# Altium PCB MiniRoverShield(1).PcbDoc
Units mm, origin at the board's own origin, x right, y up, seen from the top; angles counter-clockwise.
Board outline 75 x 51 mm, 2 copper layers (F.Cu, B.Cu); 33 components, 48 nets, 185 pads, 277 vias.
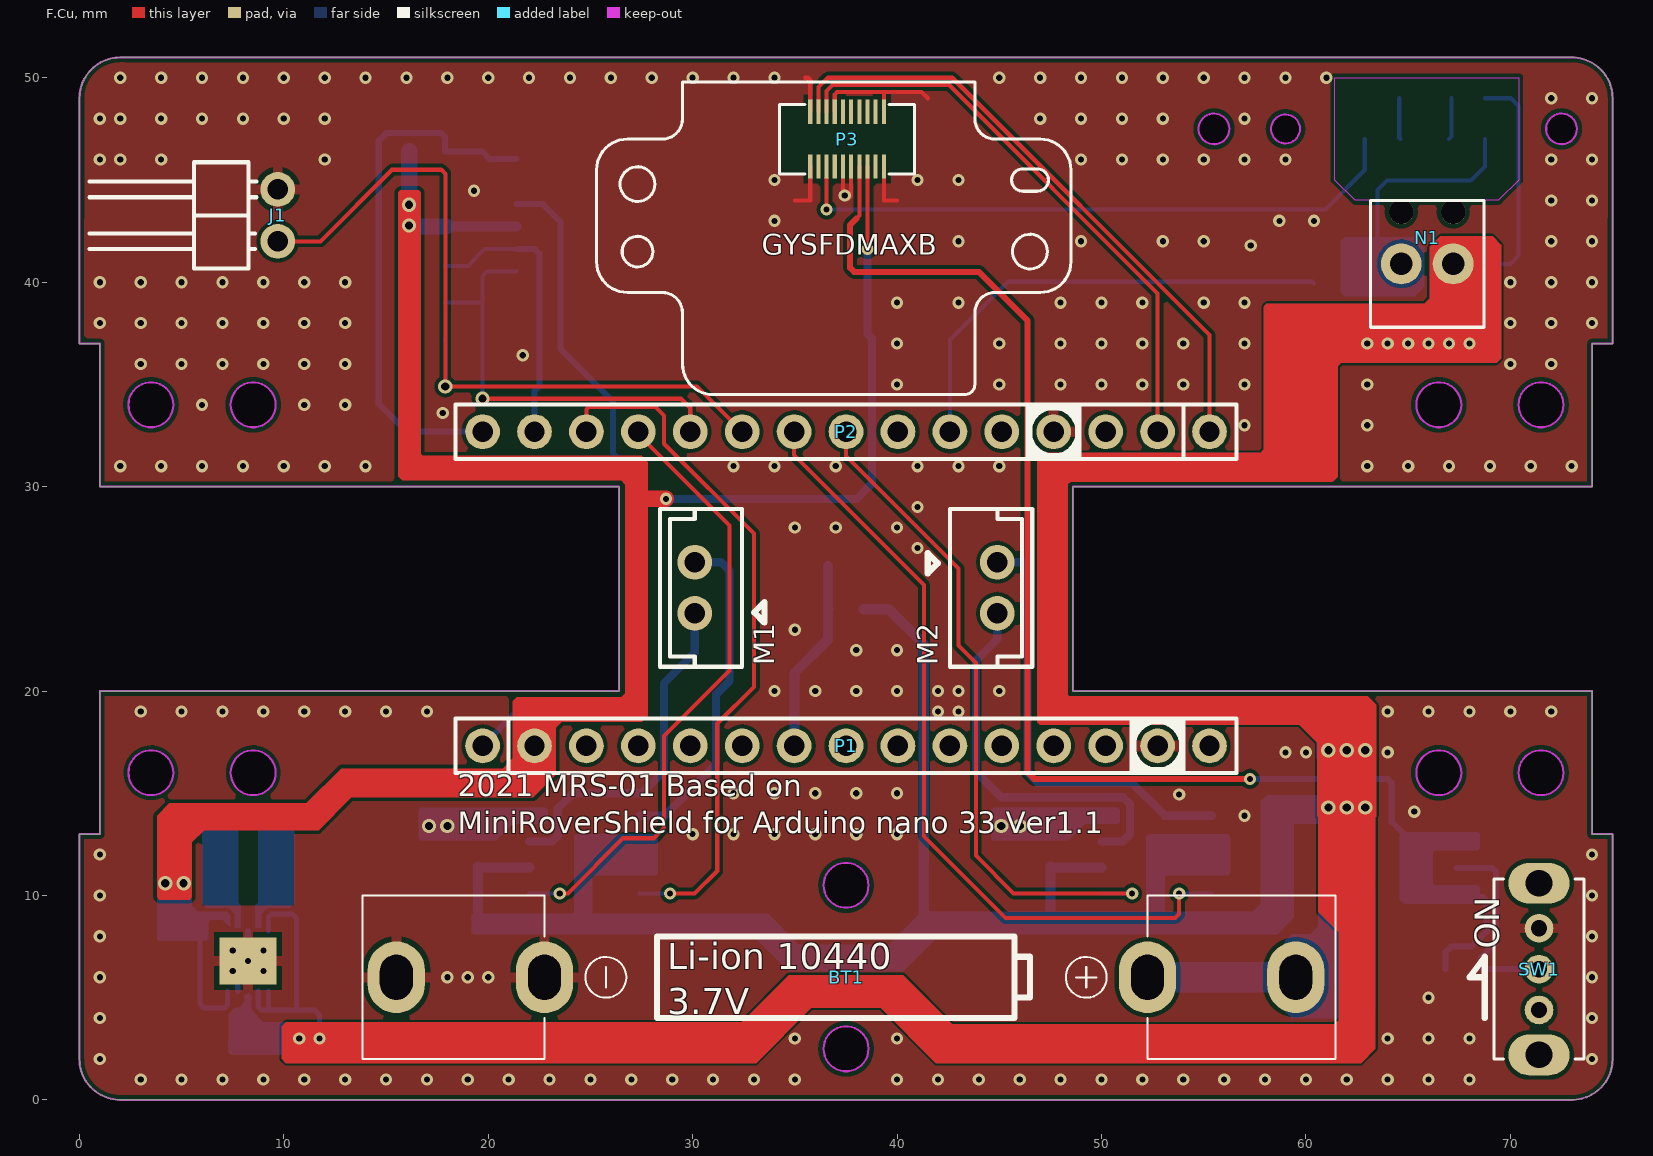
[diagram p0: F.Cu view]
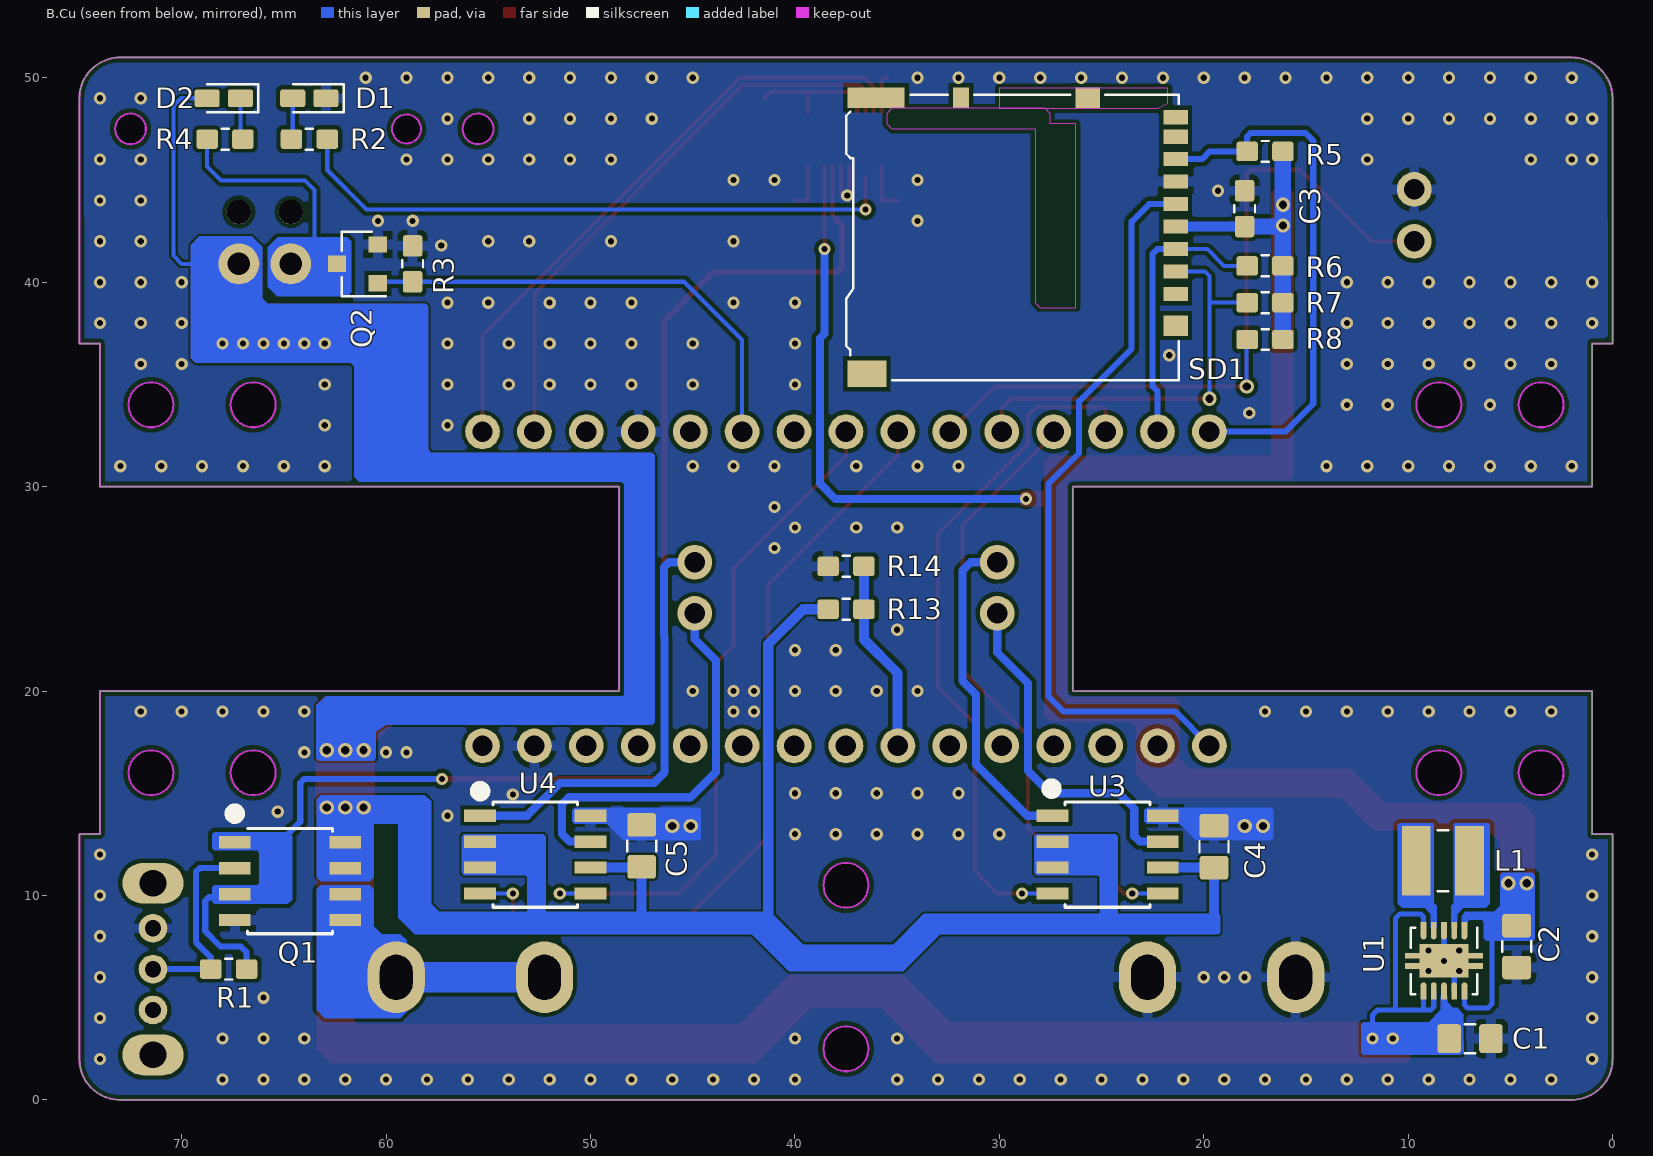
[diagram p1: B.Cu view, seen from below]

## Layer stack, top to bottom
F.Mask: solder mask 0.0102, Solder Resist, Dk 3.5
F.Cu: signal copper 0.0356
Dielectric 1: dielectric 0.32, FR-4, Dk 4.8
B.Cu: signal copper 0.0356
B.Mask: solder mask 0.0102, Solder Resist, Dk 3.5

## Board outline
0,2 0,13 1,13 1,20 26.4,20 26.4,30 1,30 1,37 0,37 0.003,49 cw(c2,49) 2.004,50.997 72.954,50.997 cw(c73,48.993) 75.004,48.991 75,37 74,37 74,30 48.6,30 48.6,20 74,20 74,13 75,13 75.003,2 cw(c73,2) 73.004,-0.003 36.004,-0.003 2,0 cw(c2,2)
cut-out: 54.754,47.497 ccw(c55.504,47.497) 55.504,46.747 ccw(c55.504,47.497) 56.254,47.497 ccw(c55.504,47.497) 55.504,48.247 ccw(c55.504,47.497)
cut-out: 58.296,47.497 ccw(c59.004,47.497) 59.004,46.79 ccw(c59.004,47.497) 59.711,47.497 ccw(c59.004,47.497) 59.004,48.204 ccw(c59.004,47.497)
cut-out: 71.754,47.497 ccw(c72.504,47.497) 72.504,46.747 ccw(c72.504,47.497) 73.254,47.497 ccw(c72.504,47.497) 72.504,48.247 ccw(c72.504,47.497)
cut-out: 65.4,34 ccw(c66.5,34) 66.5,32.9 ccw(c66.5,34) 67.6,34 ccw(c66.5,34) 66.5,35.1 ccw(c66.5,34)
cut-out: 70.4,34 ccw(c71.5,34) 71.5,32.9 ccw(c71.5,34) 72.6,34 ccw(c71.5,34) 71.5,35.1 ccw(c71.5,34)
cut-out: 70.4,16 ccw(c71.5,16) 71.5,14.9 ccw(c71.5,16) 72.6,16 ccw(c71.5,16) 71.5,17.1 ccw(c71.5,16)
cut-out: 65.4,16 ccw(c66.5,16) 66.5,14.9 ccw(c66.5,16) 67.6,16 ccw(c66.5,16) 66.5,17.1 ccw(c66.5,16)
cut-out: 36.404,2.497 ccw(c37.504,2.497) 37.504,1.397 ccw(c37.504,2.497) 38.604,2.497 ccw(c37.504,2.497) 37.504,3.597 ccw(c37.504,2.497)
cut-out: 36.404,10.497 ccw(c37.504,10.497) 37.504,9.397 ccw(c37.504,10.497) 38.604,10.497 ccw(c37.504,10.497) 37.504,11.597 ccw(c37.504,10.497)
cut-out: 7.4,16 ccw(c8.5,16) 8.5,14.9 ccw(c8.5,16) 9.6,16 ccw(c8.5,16) 8.5,17.1 ccw(c8.5,16)
cut-out: 8.5,32.9 cw(c8.5,34) 7.4,34 cw(c8.5,34) 8.5,35.1 cw(c8.5,34) 9.6,34 cw(c8.5,34)
cut-out: 3.5,32.9 cw(c3.5,34) 2.4,34 cw(c3.5,34) 3.5,35.1 cw(c3.5,34) 4.6,34 cw(c3.5,34)
cut-out: 2.4,16 ccw(c3.5,16) 3.5,14.9 ccw(c3.5,16) 4.6,16 ccw(c3.5,16) 3.5,17.1 ccw(c3.5,16)

## Design rules (kind name [scope] priority, off if disabled: settings)
Clearance "Clearence 0.3_NetClass" [InNetClass('Vbat')] p1: gap=0.127 ignorepadtopadclearanceinfootprint=FALSE
Clearance "Clearence 0.3_Polygon" [InNamedPolygon('B.Cu-GND') OR InNamedPolygon('F.Cu-GND')] p2: gap=0.2 ignorepadtopadclearanceinfootprint=FALSE
Clearance "Clearence 0.2_NetClass" [InNetClass('3.3V')] p3: gap=0.2 ignorepadtopadclearanceinfootprint=FALSE
Clearance "Clearence 0.1524_NetClass" [InNetClass('Default')] p4: gap=0.152 ignorepadtopadclearanceinfootprint=FALSE
HoleSize "Hole Size (Default)" [All] p1: absolutevalues=TRUE maxlimit=10 minlimit=0.3 maxpercent=80.000 minpercent=20.000
MinimumSolderMaskSliver [All] p1: minsoldermaskwidth=0
PolygonConnect Polygon_F.Cu-GND_ConnectDirect [IsNamedPolygon('F.Cu-GND') vs IsVia] p1: connectstyle=Direct reliefconductorwidth=0.254 reliefentries=4 polygonreliefangle="90 Angle" airgapwidth=0.254
PolygonConnect Polygon_F.Cu-GND_ConnectRelief45 [IsNamedPolygon('F.Cu-GND') vs (IsThruPin or IsSMTPin) and (PadShape_AllLayers = 'Round')] p2: connectstyle=Relief reliefconductorwidth=0.508 reliefentries=4 polygonreliefangle="45 Angle" airgapwidth=0.254
PolygonConnect Polygon_F.Cu-GND_ConnectRelief90 [IsNamedPolygon('F.Cu-GND') vs (IsThruPin or IsSMTPin) and (PadShape_AllLayers <> 'Round')] p3: connectstyle=Relief reliefconductorwidth=0.508 reliefentries=4 polygonreliefangle="90 Angle" airgapwidth=0.254
PolygonConnect Polygon_B.Cu-GND_ConnectDirect [IsNamedPolygon('B.Cu-GND') vs IsVia] p4: connectstyle=Direct reliefconductorwidth=0.254 reliefentries=4 polygonreliefangle="90 Angle" airgapwidth=0.254
PolygonConnect Polygon_B.Cu-GND_ConnectRelief45 [IsNamedPolygon('B.Cu-GND') vs (IsThruPin or IsSMTPin) and (PadShape_AllLayers = 'Round')] p5: connectstyle=Relief reliefconductorwidth=0.508 reliefentries=4 polygonreliefangle="45 Angle" airgapwidth=0.254
PolygonConnect Polygon_B.Cu-GND_ConnectRelief90 [IsNamedPolygon('B.Cu-GND') vs (IsThruPin or IsSMTPin) and (PadShape_AllLayers <> 'Round')] p6: connectstyle=Relief reliefconductorwidth=0.508 reliefentries=4 polygonreliefangle="90 Angle" airgapwidth=0.254
RoutingVias [All] p1: holewidth=0.3 width=0.6 viastyle="Through Hole" minholewidth=0.3 minwidth=0.5 maxholewidth=0.5 maxwidth=1
SilkToSilkClearance [All] p1: silktosilkclearance=0
SilkToSolderMaskClearance [IsPad] p1: minsilkscreentomaskgap=0 clearancetoexposedcopper=TRUE
SolderMaskExpansion [All] p1: expansion=0.102 istentingtop=FALSE
Width [All] p1: maxlimit=10 minlimit=0.152 preferedwidth=0.2 minimp=50.000000 maximp=50.000000 favimp=50.000000
26 further rules are at their usual default settings.

## Classes and differential pairs
net class Vbat: +VSW
net class 3.3V: +3V3
net class Default: +BATT Arduino←GPS Arduino→GPS CS flightPin GND MISO MOSI MotorL1 MotorL2 MotorR1 MotorR2 Net-(BT1-Pad1) Net-(D1-Pad2) Net-(D2-Pad1) Net-(L1-Pad1) Net-(L1-Pad2) Net-(M1-Pad1) Net-(M1-Pad2) Net-(M2-Pad1) Net-(M2-Pad2) Net-(N1-Pad2) Net-(P1-Pad3) Net-(P1-Pad4) Net-(P1-Pad5) Net-(P1-Pad6) Net-(P1-Pad8) Net-(P1-Pad9) Net-(P1-Pad10) Net-(P1-Pad11) Net-(P1-Pad12) Net-(P1-Pad13) Net-(P1-Pad15) Net-(P2-Pad3) Net-(P2-Pad5) Net-(P2-Pad7) Net-(P3-Pad4) Net-(P3-Pad6) Net-(Q1-Pad2) Net-(SD1-Pad1) Net-(SD1-Pad8) Net-(SD1-Pad9) Nichrome SCK Vbatt

## Components (designator, comment, footprint, x,y, rotation, side; value= is the part's Value field where it differs from the comment)
BT1 "Comment" BC-0402_AAA 52.254,5.997 r180 top locked
C1 "Comment" C_0805_2012Metric_Pad1.15x1.40mm_HandSolder 6.975,3 r0 bottom
C2 "Comment" C_0805_2012Metric_Pad1.15x1.40mm_HandSolder 4.7,7.5 r90 bottom
C3 "Comment" C_0603_1608Metric_Pad1.05x0.95mm_HandSolder 18.004,43.597 r270 bottom
C4 "Comment" C_0805_2012Metric_Pad1.15x1.40mm_HandSolder 19.5,12.383 r270 bottom
C5 "Comment" C_0805_2012Metric_Pad1.15x1.40mm_HandSolder 47.5,12.425 r270 bottom
D1 "Comment" LED_0603_1608Metric_Castellated 63.754,48.997 r180 bottom
D2 "Comment" LED_0603_1608Metric_Castellated 67.941,48.997 r180 bottom
J1 "Comment" PinHeader_1x02_P2.54mm_Horizontal 9.704,41.997 r180 top
L1 "Comment" TDK_VLS3012 8.3,11.7 r0 bottom
M1 "Comment" JST_EH_B02B-EH-A_1x02_P2.50mm_Vertical 30.104,23.797 r90 top
M2 "Comment" JST_EH_B02B-EH-A_1x02_P2.50mm_Vertical 44.904,26.297 r270 top
N1 "Comment" MPT0.5_2-2.54 68.704,43.997 r180 top
P1 "Comment" PinSocket_1x15_P2.54mm_Vertical 19.724,17.317 r90 top
P2 "Comment" PinSocket_1x15_P2.54mm_Vertical 55.284,32.687 r270 top
P3 "GYSFDMAXB" GYSFDMAXB 37.554,46.997 r180 top locked
Q1 "Comment" SOIC-8_3.9x4.9mm_P1.27mm 64.7,10.7 r0 bottom
Q2 "Comment" SOT-23 61.404,40.897 r180 bottom
R1 "Comment" R_0603_1608Metric_Pad1.05x0.95mm_HandSolder 67.701,6.399 r180 bottom
R2 "Comment" R_0603_1608Metric_Pad1.05x0.95mm_HandSolder 63.754,46.997 r180 bottom
R3 "Comment" R_0603_1608Metric_Pad1.05x0.95mm_HandSolder 58.704,40.897 r270 bottom
R4 "Comment" R_0603_1608Metric_Pad1.05x0.95mm_HandSolder 67.879,46.997 r180 bottom
R5 "Comment" R_0603_1608Metric_Pad1.05x0.95mm_HandSolder 17.004,46.397 r180 bottom
R6 "Comment" R_0603_1608Metric_Pad1.05x0.95mm_HandSolder 17.004,40.797 r180 bottom
R7 "Comment" R_0603_1608Metric_Pad1.05x0.95mm_HandSolder 17.004,38.997 r180 bottom
R8 "Comment" R_0603_1608Metric_Pad1.05x0.95mm_HandSolder 17.004,37.197 r180 bottom
R13 "Comment" R_0603_1608Metric_Pad1.05x0.95mm_HandSolder 37.5,24 r0 bottom
R14 "Comment" R_0603_1608Metric_Pad1.05x0.95mm_HandSolder 37.5,26.1 r180 bottom
SD1 "Comment" microSD_HC_Hirose_DM3AT-SF-PEJM5 29.104,42.197 r90 bottom locked
SW1 "Power" SS-12D01-VG4 71.404,6.397 r270 top
U1 "Comment" Texas_S-PVSON-N10_ThermalVias 8.25,6.8 r90 bottom
U3 "Comment" SOIC-8_3.9x4.9mm_P1.27mm 24.704,11.997 r0 bottom
U4 "Comment" SOIC-8_3.9x4.9mm_P1.27mm 52.704,11.997 r0 bottom

## Footprints (in the part's own frame and the unit in brackets; to place one, negate y for a bottom-side part, rotate by r counter-clockwise, add the part's x,y. Pads: shape width x height; smd on the part's side, far side on the other; paste and mask are expansions set on the pad)
BC-0402_AAA [mm]
  rrect100% 2.8x3.5 hole 2.2 slot 1.6 at 0 deg paste-3.5 mask-0.4: 1(-7.25,0) 1(0,0) 2(29.5,0) 2(36.75,0)
  silkscreen extent -9.2,-4 38.4,4
C_0603_1608Metric_Pad1.05x0.95mm_HandSolder [mm]
  rrect25% 1.05x0.95 smd paste-1.05 mask+0: 1(0.875,0) 2(-0.875,0)
  silkscreen extent -0.17,-0.51 0.17,0.51
C_0805_2012Metric_Pad1.15x1.40mm_HandSolder [mm]
  rrect22% 1.15x1.4 smd paste-1.4 mask+0: 1(1.025,0) 2(-1.025,0)
  silkscreen extent -0.26,-0.71 0.26,0.71
GYSFDMAXB [mm]
  rect 0.2x1.19 smd paste-2.5 mask+0: 1(1.8,-1.34) 2(1.8,1.34) 3(1.4,-1.34) 4(1.4,1.34) 5(1,-1.34) 6(1,1.34) 7(0.6,-1.34) 8(0.6,1.34) 9(0.2,-1.34) 10(0.2,1.34) 11(-0.2,-1.34) 12(-0.2,1.34) 13(-0.6,-1.34) 14(-0.6,1.34) 15(-1,-1.34) 16(-1,1.34) 17(-1.4,-1.34) 18(-1.4,1.34) 19(-1.8,-1.34) 20(-1.8,1.34)
  silkscreen extent -10.95,-2.8 12.25,12.5
JST_EH_B02B-EH-A_1x02_P2.50mm_Vertical [mm]
  round 1.7 hole 1 paste-2 mask-0.2: 1(0,0)
  rrect100% 1.7x1.7 hole 1 paste-2 mask-0.2: 2(2.5,0)
  silkscreen extent -2.61,-2.31 5.11,1.71
LED_0603_1608Metric_Castellated [mm]
  rrect25% 1.225x0.85 smd paste-1.225 mask+0: 1(0.813,0) 2(-0.813,0)
  silkscreen extent -0.8,-0.68 1.69,0.68
microSD_HC_Hirose_DM3AT-SF-PEJM5 [mm]
  rect 0.7x1.2 smd paste-1.2 mask+0: 1(-2.775,-7.725) 2(-1.675,-7.725) 3(-0.575,-7.725) 4(0.525,-7.725) 5(1.625,-7.725) 6(2.725,-7.725) 7(3.825,-7.725) 8(4.925,-7.725) 9(5.875,-7.725)
  rect 1x0.8 smd paste-1 mask+0: 10(6.825,2.775)
  rect 1.3x1.9 smd paste-1.9 mask+0: 11(-6.675,7.375)
  rect 1x1.2 smd paste-1.2 mask+0: 11(-4.325,-7.725) 11(6.825,-3.425)
  rect 1x2.8 smd paste-2.8 mask+0: 11(6.825,6.925)
  silkscreen extent -6.99,-7.89 6.98,8.38
MPT0.5_2-2.54 [mm]
  round 2 hole 1.1 paste-2 mask+0: 1(1.5,3.1) 2(4.04,3.1)
  round 1.2 hole 1.2 paste-1.2 mask+0: Un1(1.5,0.56) Un2(4.04,0.56)
  silkscreen extent 0,0 5.54,6.2
PinHeader_1x02_P2.54mm_Horizontal [mm]
  round 1.7 hole 1 paste-1.7 mask+0: 1(0,0)
  rrect100% 1.7x1.7 hole 1 paste-1.7 mask+0: 2(0,-2.54)
  silkscreen extent 1.04,-3.87 9.2,1.33
PinSocket_1x15_P2.54mm_Vertical [mm]
  round 1.7 hole 1 paste-1.7 mask+0: 1(0,0)
  rrect100% 1.7x1.7 hole 1 paste-1.7 mask+0: 2(0,-2.54) 3(0,-5.08) 4(0,-7.62) 5(0,-10.16) 6(0,-12.7) 7(0,-15.24) 8(0,-17.78) 9(0,-20.32) 10(0,-22.86) 11(0,-25.4) 12(0,-27.94) 13(0,-30.48) 14(0,-33.02) 15(0,-35.56)
  silkscreen extent -1.33,-36.89 1.33,1.33
R_0603_1608Metric_Pad1.05x0.95mm_HandSolder [mm]
  rrect25% 1.05x0.95 smd paste-1.05 mask+0: 1(0.875,0) 2(-0.875,0)
  silkscreen extent -0.17,-0.51 0.17,0.51
SOIC-8_3.9x4.9mm_P1.27mm [mm]
  rect 1.55x0.6 smd paste-1.55 mask+0: 1(2.7,-1.905) 2(2.7,-0.635) 3(2.7,0.635) 4(2.7,1.905) 5(-2.7,1.905) 6(-2.7,0.635) 7(-2.7,-0.635) 8(-2.7,-1.905)
  silkscreen extent -2.08,-2.58 2.07,2.57
SOT-23 [mm]
  rect 0.9x0.8 smd paste-0.9 mask+0: 1(1,-0.95) 2(1,0.95) 3(-1,0)
  silkscreen extent -0.76,-1.58 1.4,1.58
SS-12D01-VG4 [mm]
  rrect100% 1.4x1.4 hole 0.8 paste-2.2 mask+0: 1(-2,0) 2(0,0) 3(2,0)
  rrect100% 2x3 hole 1.3 paste-3 mask+0: Un1(-4.2,0) Un2(4.2,0)
  silkscreen extent -4.4,-2.2 4.4,2.2
TDK_VLS3012 [mm]
  rect 1.4x3.4 smd paste-3.4 mask+0: 1(1.3,0) 2(-1.3,0)
  silkscreen extent -0.25,-1.49 0.25,1.5
Texas_S-PVSON-N10_ThermalVias [mm]
  rrect100% 0.85x0.28 smd paste-0.85 mask+0.07: 1(1.475,-1) 2(1.475,-0.5) 3(1.475,0) 4(1.475,0.5) 5(1.475,1) 6(-1.475,1) 7(-1.475,0.5) 8(-1.475,0) 9(-1.475,-0.5) 10(-1.475,-1)
  rect 0.28x0.28 smd paste-0.28 mask+0.07: 1(1.76,-1) 2(1.76,-0.5) 3(1.76,0) 4(1.76,0.5) 5(1.76,1) 6(-1.76,1) 7(-1.76,0.5) 8(-1.76,0) 9(-1.76,-0.5) 10(-1.76,-1)
  round 0.6 hole 0.3 paste-0.6 mask+0: 11(-0.5,-0.75) 11(-0.5,0.75) 11(0,0) 11(0.5,-0.75) 11(0.5,0.75)
  rect 0.68x1.05 smd paste-1.05 mask+0: 11(-0.45,-0.635) 11(-0.45,0.635) 11(0.45,-0.635) 11(0.45,0.635)
  rect 0.26x0.5 smd paste-0.5 mask+0: 11(-0.25,-1.63) 11(-0.25,1.63) 11(0.25,-1.63) 11(0.25,1.63)
  rect 0.28x0.7 smd paste-0.7 mask+0: 11(-0.25,-1.55) 11(-0.25,1.55) 11(0.25,-1.55) 11(0.25,1.55)
  rect 1.65x2.4 smd paste-2.4 mask+0: 11(0,0)
  rect 2.3x2.8 smd far side paste-2.8 mask-2.8: 11(0,0)
  silkscreen extent -1.63,-1.63 1.63,1.63

## Part data
BT1: library part BC-0402_AAA
C1 C2 C4 C5: library part C_0805_2012Metric_Pad1.15x1.40mm_HandSolder, "Capacitor SMD 0805 (2012 Metric), square (rectangular) end terminal, IPC_7351 nominal with elongated pad for handsoldering. (Body size source: https://docs.google.com/spreadsheets/d/1BsfQQcO9C6DZCsRaXUlFlo91Tg2WpOkGARC1WS5S8t0/edit?usp=sharing), generated with kicad-footprint-generator"
C3: library part C_0603_1608Metric_Pad1.05x0.95mm_HandSolder, "Capacitor SMD 0603 (1608 Metric), square (rectangular) end terminal, IPC_7351 nominal with elongated pad for handsoldering. (Body size source: http://www.tortai-tech.com/upload/download/2011102023233369053.pdf), generated with kicad-footprint-generator"
D1 D2: library part LED_0603_1608Metric_Castellated, "LED SMD 0603 (1608 Metric), castellated end terminal, IPC_7351 nominal, (Body size source: http://www.tortai-tech.com/upload/download/2011102023233369053.pdf), generated with kicad-footprint-generator"
J1: library part PinHeader_1x02_P2.54mm_Horizontal, "Through hole angled pin header, 1x02, 2.54mm pitch, 6mm pin length, single row"
L1: library part TDK_VLS3012
M1 M2: library part JST_EH_B02B-EH-A_1x02_P2.50mm_Vertical, "JST EH series connector, B02B-EH-A (http://www.jst-mfg.com/product/pdf/eng/eEH.pdf), generated with kicad-footprint-generator"
N1: library part MPT0.5_2-2.54
P1 P2: library part PinSocket_1x15_P2.54mm_Vertical, "Through hole straight socket strip, 1x15, 2.54mm pitch, single row (from Kicad 4.0.7), script generated"
Q1 U3 U4: library part SOIC-8_3.9x4.9mm_P1.27mm, "8-Lead Plastic Small Outline (SN) - Narrow, 3.90 mm Body [SOIC] (see Microchip Packaging Specification 00000049BS.pdf)"
Q2: library part SOT-23, "SOT-23, Standard"
R1 R2 R3 R4 R5 R6 R7 R8 R13 R14: library part R_0603_1608Metric_Pad1.05x0.95mm_HandSolder, "Resistor SMD 0603 (1608 Metric), square (rectangular) end terminal, IPC_7351 nominal with elongated pad for handsoldering. (Body size source: http://www.tortai-tech.com/upload/download/2011102023233369053.pdf), generated with kicad-footprint-generator"
SD1: library part microSD_HC_Hirose_DM3AT-SF-PEJM5, "Micro SD, SMD, right-angle, push-pull (https://www.hirose.com/product/en/download_file/key_name/DM3AT-SF-PEJM5/category/Drawing%20(2D)/doc_file_id/44099/?file_category_id=6&item_id=06090031000&is_series=)"
SW1: library part SS-12D01-VG4
U1: library part Texas_S-PVSON-N10_ThermalVias, "3x3mm Body, 0.5mm Pitch, S-PVSON-N10, DRC, http://www.ti.com/lit/ds/symlink/tps61201.pdf"

## Via types
v1: diameter 0.6, hole 0.3, F.Cu to B.Cu, tented both sides, 261 vias
v2: diameter 0.7, hole 0.4, F.Cu to B.Cu, tented both sides, 16 vias

## Nets (pads, with @x,y where several pads share a name; then routed paths per layer and width w, separated by ;. In a path a pad name is that pad's centre, name@x,y a point inside that pad or via, vN(x,y) a via of type N, cw(c..) or ccw(c..) an arc to the next point about the centre after c; other vN are vias at no path point)
+3V3: C2.1 C3.1 P1.2 P3.16 R5.1 R6.1 R7.1 R8.1 SD1.4 U1.1 U1.10 | length 47.5
  F.Cu w0.2: v1@38.548,41.615 v1(38.554,41.621) P3.16
  F.Cu w0.8: 27.3,29.4 v1(28.7,29.4)
  B.Cu w0.25: 5.9,8.2 5.9,4.7 6.1,4.5 7.1,4.5 7.25,4.65 7.25,5.04 U1.10@7.25,5.325
  B.Cu w0.4: v1(28.7,29.4) 38.027,29.4 38.774,30.147 38.774,37.259 38.554,37.479 v1(38.554,41.621)
  B.Cu w0.5: C3.1 SD1.4
  B.Cu w0.8: R8.1 R7.1 R6.1 v2@16.129,42.697 ; R5.1 v2(16.129,43.789) v2(16.129,42.769) v2@16.129,42.697 ; C3.1@17.954,42.722 16.154,42.722 v2@16.129,42.697 ; P1.2 P1.2@22.312,17.366
  other v2: 4.2,10.6 5.1,10.6
+BATT: P3.14 Q1.1 Q1.3 R1.1 | length 66.9
  F.Cu w0.2: 38,43.1 38.154,43.254 P3.14
  F.Cu w0.3: 38,43.1 37.7,42.8 37.7,40.7 37.9,40.5 44,40.5 46.384,38.116 46.384,16.016 46.7,15.7 v1(57.26,15.7)
  B.Cu w0.3: v1(57.26,15.7) 64,15.7 64.2,15.5 64.2,13.6 65.195,12.605 Q1.1 ; R1.1 66.826,7.226 67.1,7.5 68.1,7.5 68.848,8.248 68.848,9.739 68.672,9.915 67.55,9.915 Q1.3
+VSW: C1.1 C4.1 C5.1 D2.2 N1.1 Q1.7 Q1.8 R13.1 U1.5 U1.6 U1.7 U1.8 U3.2 U3.3 U3.6 U4.2 U4.3 U4.6 | length 59.6
  F.Cu w1.5: v1(10.754,3.004) 10.757,3 v1(11.75,3) 17.997,3 18.004,3.007
  B.Cu w0.2: N1.1 69.997,40.897 70.4,41.3 70.4,48.627 70.03,48.997 D2.2
  B.Cu w0.25: U1.7@8.75,5.325 8.75,4.546 8.896,4.4 9.288,4.4 ; U1.6@9.25,5.325 9.25,5.04 9.25,4.438 9.288,4.4 ; U1.5@9.25,8.275 9.25,8.56 9.25,8.95 9.4,9.1 10.4,9.1 10.628,8.872 10.628,4.406 10.622,4.4 ; v1(11.75,3) 11.75,4.15 11.5,4.4 10.622,4.4 ; 9.288,4.4 10.622,4.4
  B.Cu w0.5: 19.5,8.9 C4.1@19.5,11.4 ; C4.1@19.538,11.362 U3.6 ; R13.1 39.6,24 41.3,22.3 41.3,8.8 ; 47.5,8.9 C5.1 47.538,11.362 U4.6
  other v1: 63,37 64,37 65,37 66,37 67,37 68,37
  other v2: 61.1,14.3 62,14.3 62.9,14.3 61.1,17.1 62,17.1 62.9,17.1
Arduino←GPS: P2.2 P3.5 | length 28.3
  F.Cu w0.2: P3.5@36.554,48.317 36.554,49.354 36.848,49.648 42.552,49.648 52.744,39.456 P2.2
Arduino→GPS: P2.1 P3.3 | length 30.5
  F.Cu w0.2: P3.3 36.154,49.542 36.612,50 42.7,50 55.284,37.416 P2.1
CS: P2.11 R7.2 SD1.2 | length 21.1
  F.Cu w0.2: v2(19.724,34.298) 29.423,34.298 29.884,33.837 P2.11
  B.Cu w0.2: R7.2 19.724,38.997 ; v2(19.724,34.298) 19.724,38.997 ; SD1.2 19.939,40.522 19.724,40.307 19.724,38.997
flightPin: J1.1 P2.10 R8.2 | length 37.9
  F.Cu w0.2: J1.1 11.797,41.997 15.3,45.5 17.704,45.5 17.9,45.304 v2(17.9,34.9) 30.211,34.9 P2.10
  B.Cu w0.2: R8.2 17.9,37.176 v2(17.9,34.9)
GND: BT1.2 C1.2 C2.2 C3.2 C4.2 C5.2 D1.1 J1.2 P1.14 P2.4 P3.1 P3.2 P3.7 P3.10 P3.12 P3.19 P3.20 Q1.4 Q2.2 R3.2 R14.2 SD1.6 SW1.1 U1.3 U1.9 U1.11 U3.8 U4.8 | length 20
  F.Cu w0.152: v1@40.941,45 v1(41,45)
  F.Cu w0.2: 35,44 35.754,44 P3.2 ; 35.491,50 35.636,50 35.754,49.883 P3.1 ; P3.7 36.954,49.178 37.071,49.295 39.354,49.295 ; P3.10 37.354,44.108 37.636,44.108 37.754,44.225 P3.12 ; P3.20 39.354,44 40,44 ; P3.19 39.354,49.295 ; 41.5,49 41.205,49.295 39.354,49.295
  B.Cu w0.28: U1.9@7.75,5.325 7.75,6.8 8.25,6.8 U1.3@8.25,8.275
  other v1: 3,1 5,1 7,1 9,1 11,1 13,1 15,1 17,1 19,1 21,1 23,1 25,1 27,1 29,1 31,1 33,1 35,1 40,1 42,1 44,1 46,1 48,1 50,1 52,1 54,1 56,1 58,1 60,1 62,1 64,1 66,1 68,1 1,2 74,2 35,3 40,3 64,3 66,3 68,3 1,4 74,4 66,5 1,6 18,6 19,6 20,6 74,6 1,8 74,8 1,10 74,10 1,12 74,12 30,13 32,13 34,13 36,13 38,13 40,13 57,13.9 65.3,14.1 53.8,14.934 32,15 34,15 36,15 38,15 40,15 59,17 60,17 64,17 3,19 5,19 7,19 9,19 11,19 13,19 15,19 17,19 42,19 43,19 64,19 66,19 68,19 70,19 72,19 34,20 36,20 38,20 40,20 42,20 43,20 45,20 38,22 40,22 35,23 41,27 35,28 37,28 40,28 41,29 2,31 4,31 6,31 8,31 10,31 12,31 14,31 32,31 34,31 37,31 41,31 43,31 45,31 63,31 65,31 67,31 69,31 71,31 73,31 57,33 63,33 17.773,33.595 6,34 11,34 13,34 40,35 45,35 48,35 50,35 52,35 54,35 57,35 63,35 3,36 5,36 7,36 9,36 11,36 13,36 70,36 72,36 21.692,36.424 40,37 45,37 48,37 50,37 52,37 54,37 57,37 1,38 3,38 5,38 7,38 9,38 11,38 13,38 70,38 72,38 74,38 40,39 43,39 48,39 50,39 52,39 55,39 57,39 1,40 3,40 5,40 7,40 9,40 11,40 13,40 70,40 72,40 74,40 57.3,41.8 43,42 49,42 53,42 55,42 72,42 74,42 34,43 58.7,43 60.4,43 72,44 74,44 37.44,44.235 19.3,44.472 34,45 43,45 1,46 2,46 4,46 12,46 49,46 51,46 53,46 55,46 57,46 59,46 72,46 74,46 1,48 2,48 4,48 6,48 8,48 10,48 12,48 47,48 49,48 51,48 53,48 57,48 72,49 74,49 2,50 4,50 6,50 8,50 10,50 12,50 14,50 16,50 18,50 20,50 22,50 24,50 26,50 28,50 30,50 32,50 34,50 45,50 47,50 49,50 51,50 53,50 55,50 57,50 59,50 61,50
  other v2: 17.1,13.4 18,13.4 45.1,13.4 46,13.4
MISO: P2.15 R5.2 SD1.7 | length 26.5
  F.Cu w0.2: P2.15@19.604,32.807 P2.15
  B.Cu w0.3: P2.15 16.013,32.687 14.644,34.056 14.644,46.911 15.033,47.3 17.703,47.3 17.879,47.124 R5.2 19.703,46.397 20.078,46.022 SD1.7
MOSI: P2.14 R6.2 SD1.3 | length 14
  B.Cu w0.2: R6.2 19.004,40.797 19.829,41.622 SD1.3 SD1.3@21.404,41.597
  B.Cu w0.3: SD1.3 22.278,41.622 22.5,41.4 22.5,34.9 22.264,34.664 P2.14 P2.14@22.3,32.723
MotorL1: P2.13 U3.4 | length 34.2
  F.Cu w0.2: P2.13 24.804,33.783 24.921,33.9 28.172,33.9 28.604,33.468 28.604,32.096 33,27.7 33,20.2 31.204,18.404 31.204,11.204 30.1,10.1 v1@28.9,10.1
  B.Cu w0.2: U3.4 27.408,10.096 v1(28.896,10.096)
MotorL2: P2.12 U3.5 | length 30.5
  F.Cu w0.2: v1@23.5,10.1 23.9,10.1 26.6,12.8 28.1,12.8 28.604,13.304 28.604,17.797 31.804,20.997 31.804,28.096 27.344,32.556 P2.12
  B.Cu w0.2: U3.5 22.008,10.096 v1(23.496,10.096)
MotorR1: P2.9 U4.4 | length 39.3
  F.Cu w0.2: P2.9 34.964,31.536 41.314,25.186 41.314,12.886 45.3,8.9 53.6,8.9 53.8,9.1 v1(53.8,10.1)
  B.Cu w0.2: v1(53.8,10.1) 55.396,10.1 U4.4
MotorR2: P2.8 U4.5 | length 33.3
  F.Cu w0.2: P2.8 37.504,31.496 43.004,25.996 43.004,22.231 43.854,21.381 43.854,11.946 45.7,10.1 v1(51.5,10.1)
  B.Cu w0.2: U4.5 50.012,10.1 v1(51.5,10.1)
Net-(BT1-Pad1): BT1.1 Q1.5 Q1.6 | length 7.3
  B.Cu w1.5: BT1.1@52.254,5.997 BT1.1@59.504,5.997
Net-(D1-Pad2): D1.2 R2.2 | length 2
  B.Cu w0.2: D1.2 64.566,47.06 R2.2
Net-(D2-Pad1): D2.1 R4.1 | length 2.1
  B.Cu w0.2: R4.1 67.129,47.122 D2.1
Net-(L1-Pad1): L1.1 U1.4
Net-(L1-Pad2): L1.2 U1.2
Net-(M1-Pad1): M1.1 U3.7 | length 17.1
  B.Cu w0.4: U3.7 23.132,12.632 23.4,12.9 23.4,14.251 24.146,14.997 27.504,14.997 28.604,16.097 28.604,20.381 30.104,21.88 M1.1
Net-(M1-Pad2): M1.2 U3.1 | length 16.4
  B.Cu w0.4: U3.1 28.639,13.902 31.144,16.407 31.144,19.839 31.804,20.499 31.804,25.896 31.403,26.297 M1.2
Net-(M2-Pad1): M2.1 U4.1 | length 21.5
  B.Cu w0.4: M2.1 46.166,26.297 46.4,26.063 46.4,22.683 46.384,22.667 46.384,16.016 46.9,15.5 51.5,15.5 53.098,13.902 U4.1
Net-(M2-Pad2): M2.2 U4.7 | length 19.4
  B.Cu w0.4: M2.2 44.904,22.547 43.854,21.497 43.854,16.046 45.1,14.8 51.064,14.8 51.4,14.464 51.4,13 51.032,12.632 U4.7
Net-(N1-Pad2): N1.2 Q2.3 R4.2 | length 10.4
  B.Cu w0.2: 63.5,41.2 63.5,44.5 63.968,44.968 68.065,44.968 68.754,45.657 R4.2 ; N1.2 N1.2@64.679,40.897
Net-(P1-Pad3): P1.3
Net-(P1-Pad4): P1.4
Net-(P1-Pad5): P1.5
Net-(P1-Pad6): P1.6
Net-(P1-Pad8): P1.8
Net-(P1-Pad9): P1.9
Net-(P1-Pad10): P1.10
Net-(P1-Pad11): P1.11
Net-(P1-Pad12): P1.12
Net-(P1-Pad13): P1.13
Net-(P1-Pad15): P1.15
Net-(P2-Pad3): P2.3
Net-(P2-Pad5): P2.5
Net-(P2-Pad7): P2.7
Net-(P3-Pad4): P3.4
Net-(P3-Pad6): P3.6 R2.1 | length 30.2
  F.Cu w0.2: v1(36.554,43.554) P3.6@36.554,45.103
  B.Cu w0.2: v1(36.554,43.554) 60.954,43.554 62.879,45.479 R2.1
Net-(Q1-Pad2): Q1.2 R1.2 SW1.2 | length 9.9
  B.Cu w0.3: Q1.2 69.124,11.335 69.3,11.159 69.3,7.7 68.576,6.976 R1.2 ; R1.2@68.575,6.4 R1.2 SW1.2
Net-(SD1-Pad1): SD1.1
Net-(SD1-Pad8): SD1.8
Net-(SD1-Pad9): SD1.9
Nichrome: P2.6 Q2.1 R3.1 | length 23.5
  B.Cu w0.2: P2.6 42.584,37.184 45.422,40.022 R3.1 60.329,40.022 Q2.1
SCK: P1.1 SD1.5 | length 36.3
  B.Cu w0.3: P1.1 21.407,19 26.865,19 27.598,19.733 27.598,30.147 26.101,31.644 26.101,34.184 23.534,36.751 23.534,42.966 22.678,43.822 SD1.5
Vbatt: P1.7 R13.2 R14.1 | length 9.6
  B.Cu w0.2: R13.2@36.715,24.14 R13.2@36.817,24.038
  B.Cu w0.5: P1.7@34.982,17.335 34.982,20.882 36.625,22.525 R14.1
"": 
pads on no net: N1.Un1 N1.Un2 P3.8 P3.9 P3.11 P3.13 P3.15 P3.17 P3.18 SD1.10 SD1.11 SW1.3 SW1.Un1 SW1.Un2

## Polygon pours and split planes (outlines as drawn)
GND on B.Cu "B.Cu-GND" (solid, remove dead copper, pour order 0): -1.996,51.997 -1.996,-0.003 76.004,-0.003 76.004,51.997
GND on F.Cu "F.Cu-GND" (solid, remove dead copper, pour order 1): -1.996,51.997 -1.996,-0.003 76.004,-0.003 76.004,51.997

## Keep-outs
F.Cu:
  region: 70.418,44.997 69.418,43.997 62.418,43.997 61.418,44.997 61.418,49.997 70.418,49.997
B.Cu:
  region: 30.004,48.497 22.254,48.497 21.754,48.747 21.754,49.497 30.004,49.497
  region: 35.504,48.247 35.504,47.747 35.254,47.497 28.254,47.497 28.254,38.997 28.004,38.747 26.254,38.747 26.254,47.747 27.504,47.747 27.504,48.247 27.754,48.497 35.254,48.497
Keep-Out Layer:
  circle w0.1: c72.504,47.497 r0.75
  circle w0.1: c55.504,47.497 r0.75
  circle w0.1: c3.5,16 r1.1
  circle w0.1: c3.5,34 r1.1
  circle w0.1: c71.5,16 r1.1
  circle w0.1: c71.5,34 r1.1
  circle w0.1: c37.504,2.497 r1.1
  circle w0.1: c37.504,10.497 r1.1
  circle w0.1: c59.004,47.497 r0.707
  circle w0.1: c8.5,16 r1.1
  circle w0.1: c8.5,34 r1.1
  circle w0.1: c66.5,16 r1.1
  circle w0.1: c66.5,34 r1.1
  lines w0.1: 0,2 ccw(c2,2) 2,0 36.004,-0.003 39.004,-0.003 73.004,-0.003 ccw(c73,2) 75.003,2 75,13 74,13 74,20 48.6,20 48.6,30 74,30 74,37 75,37 75.004,48.991 ccw(c73,48.993) 72.954,50.997 2.004,50.997 ccw(c2,49) 0.003,49 0,37 1,37 1,30 26.4,30 26.4,20 1,20 1,13 0,13 0,2

## Other copper
F.Cu:
  pour cut-out: 34.254,48.697 40.854,48.697 40.854,45.297 34.254,45.297
  pour cut-out: 10.5,13.5 6,13.5 6,9.5 10.5,9.5
  region net +VSW: 46.865,18.464 cw(c46.9,18.5) 46.85,18.5 46.85,31.5 cw(c46.9,31.5) 46.865,31.536 46.864,31.536 46.964,31.636 46.964,31.635 cw(c47,31.6) 47,31.65 57.779,31.65 57.95,31.821 57.95,38.8 cw(c58,38.8) 57.965,38.836 57.964,38.836 58.064,38.936 58.064,38.935 cw(c58.1,38.9) 58.1,38.95 65.779,38.95 66.05,39.221 66.05,41.7 cw(c66.1,41.7) 66.065,41.736 66.064,41.736 66.564,42.236 66.564,42.235 cw(c66.6,42.2) 66.6,42.25 69.1,42.25 cw(c69.1,42.2) 69.136,42.235 69.136,42.236 69.536,41.836 69.535,41.836 cw(c69.5,41.8) 69.55,41.8 69.55,36.3 cw(c69.5,36.3) 69.535,36.264 69.536,36.264 69.336,36.064 69.336,36.065 cw(c69.3,36.1) 69.3,36.05 61.721,36.05 61.55,35.879 61.55,30.5 cw(c61.5,30.5) 61.535,30.464 61.536,30.464 61.336,30.264 61.336,30.265 cw(c61.3,30.3) 61.3,30.25 48.493,30.25 48.35,30.107 48.35,19.821 48.421,19.75 63,19.75 cw(c63,19.7) 63.036,19.735 63.036,19.736 63.436,19.336 63.435,19.336 cw(c63.4,19.3) 63.45,19.3 63.45,13.9 cw(c63.4,13.9) 63.4,13.85 60.6,13.85 cw(c60.6,13.9) 60.55,13.9 60.55,17.479 59.679,18.35 47,18.35 cw(c47,18.4) 46.964,18.365 46.964,18.364
  region net +3V3: 21.2,17.8 21.2,19.5 21.4,19.7 26.5,19.7 26.7,19.9 26.7,30.1 26.5,30.3 15.8,30.3 15.6,30.5 15.6,44.4 15.7,44.5 16.6,44.5 16.7,44.4 16.7,31.6 16.8,31.5 27.5,31.5 27.8,31.2 27.8,18.8 27.5,18.5 23.6,18.5 23.3,18.2
  region net +VSW: 61.9,1.8 41.9,1.8 39.2,4.5 35.8,4.5 33.1,1.8 10.1,1.8 9.9,2 9.9,3.6 10.1,3.8 13.8,3.8 32.4,3.8 34.7,6.1 40.3,6.1 42.7,3.7 61.9,3.7
  region net +VSW: 61.6,1.6
  region net +VSW: 60.6,14.7 60.8,14.9 63.2,14.9 63.4,14.7 63.4,2.5 62.7,1.8 61.4,1.8 61.4,3.7 61.6,3.9 61.6,8.2 60.6,9.2
  region net +3V3: 3.8,9.9 3.9,9.8 5.4,9.8 5.5,9.9 5.5,12.6 6.1,13.2 11.7,13.2 13.3,14.8 22.2,14.8 23.3,15.9 23.3,18.2 23.2,18.3 21.3,18.3 21.2,18.2 21.2,16.7 20.7,16.2 12.8,16.2 11.1,14.5 4.4,14.5 3.8,13.9
B.Cu:
  pour cut-out: 10.5,13.5 6,13.5 6,9.5 10.5,9.5
  region net +VSW: 42.4,8.4 40.3,6.3 34.7,6.3 32.9,8.1 19.3,8.1 19.2,8.157 19.2,9.043 19.3,9.1 33.7,9.1 35.2,7.6 39.6,7.6 41.2,9.2 42.4,9.2
  region net +VSW: 46.865,18.464 cw(c46.9,18.5) 46.85,18.5 46.85,31.5 cw(c46.9,31.5) 46.865,31.536 46.964,31.636 cw(c46.999,31.601) 47,31.65 57.779,31.65 57.95,31.821 57.95,38.8 cw(c58,38.8) 57.965,38.836 58.064,38.936 cw(c58.099,38.901) 58.1,38.95 65.779,38.95 66.05,39.221 66.05,41.7 cw(c66.1,41.7) 66.064,41.736 66.564,42.235 cw(c66.599,42.201) 66.6,42.25 69.1,42.25 cw(c69.1,42.201) 69.136,42.235 69.536,41.836 cw(c69.502,41.801) 69.55,41.8 69.55,36.3 cw(c69.501,36.3) 69.535,36.264 69.336,36.064 cw(c69.301,36.099) 69.3,36.05 61.721,36.05 61.55,35.879 61.55,30.5 cw(c61.501,30.5) 61.535,30.464 61.336,30.264 cw(c61.301,30.299) 61.3,30.25 48.493,30.25 48.35,30.107 48.35,19.821 48.421,19.75 62.924,19.75 63,19.7 63.052,19.653 63.072,19.63 63,19.7 63.406,19.306 63.406,16.7 63.3,16.6 60.6,16.6 60.5,16.7 60.5,18 60,18.35 47,18.35 cw(c47,18.4) 46.964,18.365
  region net Net-(N1-Pad2): 61.7,42 61.9,42.2 65.3,42.2 65.8,41.7 65.8,39.787 65.313,39.3 61.9,39.3 61.7,39.5
  region net GND: 50.8,14.3 50.9,14.2 50.9,13.6 50.8,13.5 49.2,13.5 48.4,12.7 44.7,12.7 44.6,12.8 44.6,14.2 44.7,14.3
  region net GND: 22.8,14.3 22.9,14.2 22.9,13.6 22.8,13.5 21.2,13.5 20.4,12.7 16.7,12.7 16.6,12.8 16.6,14.2 16.7,14.3
  region: 22.7,14.3
  region net +VSW: 28.2,13 28.3,12.9 28.3,11.1 28.2,11 25.2,11 25.1,10.9 25.1,8.9 24.2,8.9 24.2,12.9 24.3,13
  region net +VSW: 56.2,13 56.3,12.9 56.3,11.1 56.2,11 53.2,11 53.1,10.9 53.1,8.9 52.2,8.9 52.2,12.9 52.3,13
  region net +VSW: 61.3,14.9 58.1,14.9 57.8,14.6 57.8,9.6 57.4,9.2 41.5,9.2 41.5,8.1 58.6,8.1 59.4,8.9 59.4,13.5 61.3,13.5
  region net +VSW: 63.2,10.7 63.4,10.9 63.4,14.7 63.2,14.9 60.8,14.9 60.6,14.7 60.6,10.9 60.8,10.7
  region net +BATT: 68.4,13.1 68.5,13 68.5,12.3 68.4,12.2 66.3,12.2 66.2,12.1 66.2,10.6 66.3,10.5 68.4,10.5 68.5,10.4 68.5,9.7 68.4,9.6 64.8,9.6 64.6,9.8 64.6,12.9 64.8,13.1
  region net Net-(BT1-Pad1): 60.6,10.3 60.8,10.5 63.2,10.5 63.4,10.3 63.4,4.4 63,4 59.3,4 59,4.3 59,7.8 59.3,8.1 60.2,8.1 60.6,8.5
  region net +3V3: 7.39,8.475 7.39,9.01 7.2,9.2 5.8,9.2 5.5,9.5 5.5,11 5.4,11.1 3.9,11.1 3.8,11 3.8,7.864 3.888,7.776 6.176,7.776 6.3,7.9 6.3,8.7 6.4,8.8 7.01,8.8 7.11,8.7
  region net Net-(L1-Pad2): 7.61,8.428 7.61,9.09 7.3,9.4 6.2,9.4 6,9.6 6,13.454 6.082,13.536 7.717,13.536 7.76,13.493 7.76,9.64 7.9,9.5 7.89,9.49 7.89,8.43
  region net Net-(L1-Pad1): 8.89,8.428 8.89,9.09 9.2,9.4 10.3,9.4 10.5,9.6 10.5,13.454 10.418,13.536 8.783,13.536 8.74,13.493 8.74,9.64 8.6,9.5 8.61,9.49 8.61,8.43
  region net +VSW: 7.3,3.4 7.3,4.2 7.6,4.5 7.81,4.5 8.1,4.79 8.1,5.09 8.25,5.24 8.4,5.09 8.4,4.4 9,3.8 12.2,3.8 12.3,3.7 12.3,2.3 12.2,2.2 7.41,2.2 7.29,2.321

## Silkscreen, mask and mechanical layers (free items; w line width, h text height)
F.SilkS:
  circle w0.1: c25.754,5.997 r1
  circle w0.1: c49.254,5.997 r1
  circle w0.2: c47.664,32.684 r1.171
  circle w0.2: c52.744,17.317 r1.171
  lines w0.1: 25.754,5.497 25.754,6.497 ; 48.754,5.997 49.754,5.997 ; 49.254,5.497 49.254,6.497
  lines w0.2: 18.394,17.317 18.394,15.987 20.994,15.987 ; 46.394,31.414 46.394,33.954 ; 46.394,31.922 46.775,31.414 47.029,31.414 46.394,32.176 ; 46.394,33.319 47.156,33.954 ; 46.394,33.573 46.902,33.954 ; 46.521,33.827 46.521,31.414 48.807,31.414 48.807,33.954 46.521,33.954 ; 46.648,31.541 48.68,31.541 ; 46.648,33.827 48.68,33.827 ; 48.172,31.414 48.934,32.049 ; 48.299,33.954 48.934,33.192 ; 48.426,31.414 48.934,31.795 ; 48.553,33.954 48.934,33.446 ; 48.934,31.414 48.934,33.954 ; 51.474,16.047 51.474,18.587 ; 51.474,16.555 51.855,16.047 52.109,16.047 51.474,16.809 ; 51.474,17.952 52.236,18.587 ; 51.474,18.206 51.982,18.587 ; 51.601,18.46 51.601,16.047 53.887,16.047 53.887,18.587 51.601,18.587 ; 51.728,16.174 53.76,16.174 ; 51.728,18.46 53.76,18.46 ; 53.252,16.047 54.014,16.682 ; 53.379,18.587 54.014,17.825 ; 53.506,16.047 54.014,16.428 ; 53.633,18.587 54.014,18.079 ; 54.014,16.047 54.014,18.587 ; 54.014,34.017 56.614,34.017 56.614,32.687
  lines w0.3: 45.75,5 46.5,5 46.5,7 45.75,7 ; 68.75,4 68.75,7 68,6 68.75,6 ; 28.25,4 28.25,8 45.75,8 45.75,4 28.25,4 ; 33.007,23.844 33.507,24.344 33.507,23.344 33.007,23.844 ; 41.5,25.75 41.5,26.75 42,26.25 41.5,25.75
  text "2021 MRS-01 Based on / MiniRoverShield for Arduino nano 33 Ver1.1" at 18.5,12.7 h1.8
  text "ON" at 69.45,7.388 h1.2 r90
  text "Li-ion 10440 / 3.7V" at 28.75,3.75 h2.2
B.SilkS:
  circle w0.5: c67.4,14 r0.25
  circle w0.5: c27.45,15.225 r0.25
  circle w0.5: c55.4,15.1 r0.25
  lines w0.15: 26.779,14.427 26.779,14.572 ; 54.779,14.427 54.779,14.572
Top Paste:
  region: 39.454,45.762 39.254,45.762 39.254,45.062 39.454,45.062
  region: 39.054,45.762 38.854,45.762 38.854,45.062 39.054,45.062
  region: 38.654,45.762 38.454,45.762 38.454,45.062 38.654,45.062
  region: 38.254,45.762 38.054,45.762 38.054,45.062 38.254,45.062
  region: 37.854,45.762 37.654,45.762 37.654,45.062 37.854,45.062
  region: 37.454,45.762 37.254,45.762 37.254,45.062 37.454,45.062
  region: 37.054,45.762 36.854,45.762 36.854,45.062 37.054,45.062
  region: 36.654,45.762 36.454,45.762 36.454,45.062 36.654,45.062
  region: 36.254,45.762 36.054,45.762 36.054,45.062 36.254,45.062
  region: 35.854,45.762 35.654,45.762 35.654,45.062 35.854,45.062
  rectangle: 35.654,48.232 35.854,48.932
  rectangle: 36.454,48.232 36.654,48.932
  rectangle: 37.254,48.232 37.454,48.932
  rectangle: 38.054,48.232 38.254,48.932
  rectangle: 38.854,48.232 39.054,48.932
  rectangle: 39.254,48.232 39.454,48.932
  rectangle: 38.454,48.232 38.654,48.932
  rectangle: 37.654,48.232 37.854,48.932
  rectangle: 36.854,48.232 37.054,48.932
  rectangle: 36.054,48.232 36.254,48.932
Edge.Cuts:
  circle w0.1: c37.504,2.497 r1.1
  circle w0.1: c37.504,10.497 r1.1
  circle w0.1: c3.5,34 r1.1
  circle w0.1: c66.5,34 r1.1
  circle w0.1: c8.5,16 r1.1
  circle w0.1: c71.5,16 r1.1
  circle w0.1: c8.5,34 r1.1
  circle w0.1: c71.5,34 r1.1
  circle w0.1: c3.5,16 r1.1
  circle w0.1: c66.5,16 r1.1
  circle w0.1: c55.504,47.497 r0.75
  circle w0.1: c59.004,47.497 r0.707
  circle w0.1: c72.504,47.497 r0.75
  pour cut-out: 3.5,32.9 cw(c3.5,34) 2.4,34 cw(c3.5,34) 3.5,35.1 cw(c3.5,34) 4.6,34 cw(c3.5,34)
  lines w0.1: 0,2 ccw(c2,2) 2,0 36.004,-0.003 39.004,-0.003 73.004,-0.003 ccw(c73,2) 75.003,2 75,13 74,13 74,20 48.6,20 48.6,30 74,30 74,37 75,37 75.004,48.991 ccw(c73,48.993) 72.954,50.997 2.004,50.997 ccw(c2,49) 0.003,49 0,37 1,37 1,30 26.4,30 26.4,20 1,20 1,13 0,13 0,2
Assembly Notes:
  lines w0.1: 46.9,18.5 46.9,29.6 46.9,31.5 47,31.6 57.8,31.6 58,31.8 58,38.8 58.1,38.9 65.8,38.9 66.1,39.2 66.1,41.7 66.2,41.8 66.6,42.2 69.1,42.2 69.5,41.8 69.5,36.3 69.3,36.1 65,36.1 61.7,36.1 61.5,35.9 61.5,30.5 61.3,30.3 59.2,30.3 48.473,30.3 48.3,30.127 48.3,19.8 48.4,19.7 63,19.7 63.4,19.3 63.4,13.9 60.6,13.9 60.6,17.5 59.7,18.4 47,18.4 46.9,18.5
  lines w0.2: -0.7,0 0,0 ; 0,-0.7 0,0 ; 0,0.7 0,0 ; 0.7,0 0,0

## Text inside footprints (layer, text, board x,y; h text height)
SD1: Cmts.User "KEEPOUT" at 29.602,47.582 h0.6; Cmts.User "KEEPOUT" at 23.977,48.657 h0.6; Cmts.User "KEEPOUT" at 37.014,36.746 h0.4 r90; Cmts.User "KEEPOUT" at 27.778,40.194 h1 r90